# Altium PCB US_shield.pcbdoc
Units mil, origin at the board's own origin, x right, y up, seen from the top; angles counter-clockwise.
Board outline 4000 x 2100 mil, 2 copper layers (Top Layer, Bottom Layer); 18 components, 75 nets, 124 pads, 8 vias.
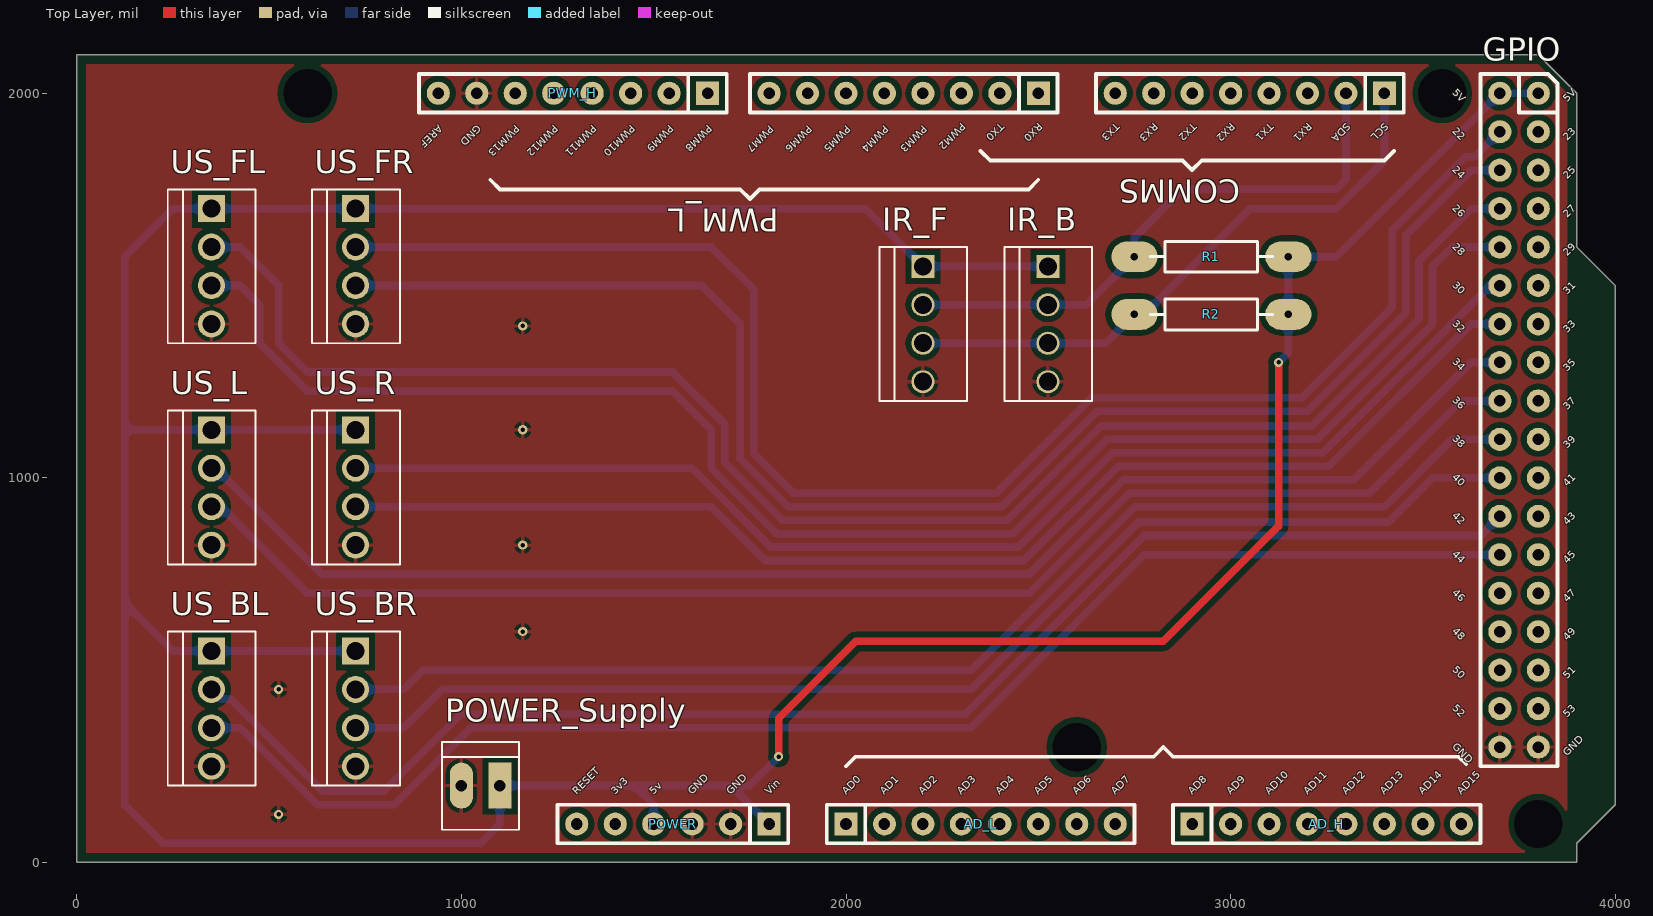
[diagram p0: Top Layer view]
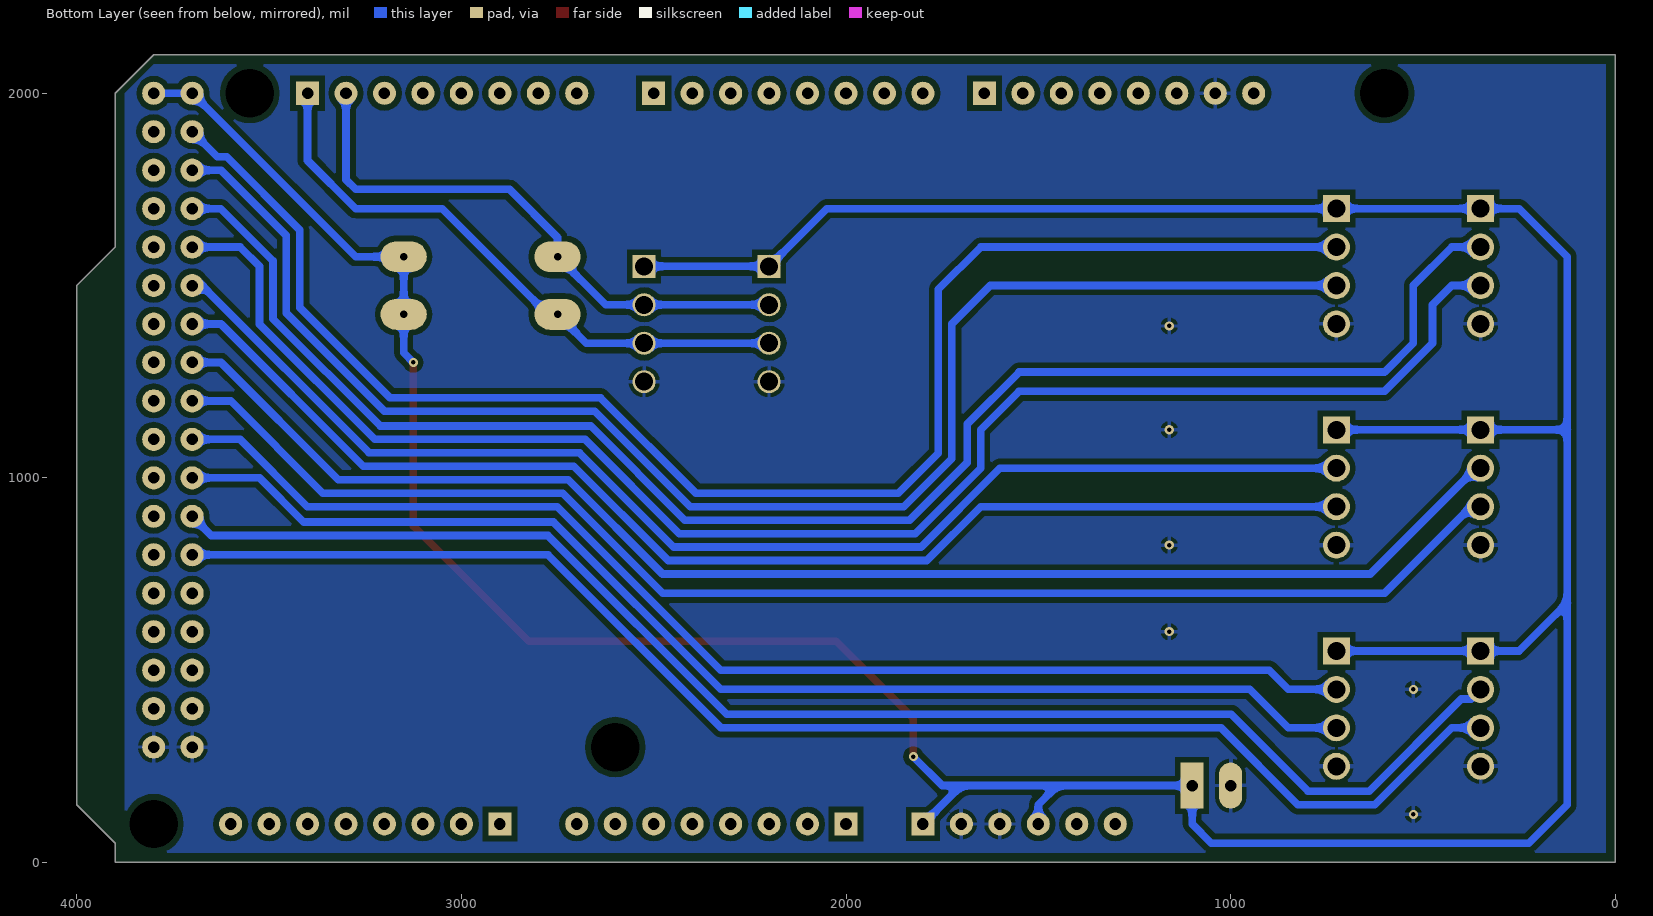
[diagram p1: Bottom Layer view, seen from below]

## Layer stack, top to bottom
Top Solder: solder mask 0.4, Solder Resist, Dk 3.5
Top Layer: signal copper 1.4
Dielectric1: dielectric 12.6, FR-4, Dk 4.8
Bottom Layer: signal copper 1.4
Bottom Solder: solder mask 0.4, Solder Resist, Dk 3.5

## Board outline
0,0 0,2100 3800,2100 3900,2000 3900,1600 4000,1500 4000,150 3900,50 3900,0

## Design rules (kind name [scope] priority, off if disabled: settings)
Clearance [All] p1: gap=15 ignorepadtopadclearanceinfootprint=FALSE
PolygonConnect [All] p1: connectstyle=Relief reliefconductorwidth=10 reliefentries=4 polygonreliefangle="90 Angle" airgapwidth=10
RoutingVias [All] p1: holewidth=28 width=50 viastyle="Through Hole" minholewidth=28 minwidth=50 maxholewidth=28 maxwidth=50
SilkToSolderMaskClearance SilkscreenOverComponentPads [IsPad] p1: minsilkscreentomaskgap=10 clearancetoexposedcopper=TRUE
SolderMaskExpansion [All] p1: expansion=4
Width [All] p1: maxlimit=40 minlimit=10 preferedwidth=20
29 further rules are at their usual default settings.

## Components (designator, comment, footprint, x,y, rotation, side; value= is the part's Value field where it differs from the comment)
AD_H "AD_H" "Header 8x1 8.5mm" 2900,100 r0 top locked
AD_L "AD_L" "Header 8x1 8.5mm" 2000,100 r0 top locked
COMMS "Communication" "Header 8x1 8.5mm" 3400,2000 r180 top
GPIO "IO_36" "HEADER 36X 8MM" 3800,2000 r270 top locked
IR_B "Molex_4" Header4_ecam#1 2525.79,1200 r90 top
IR_F "Molex_4" Header4_ecam#1 2200.79,1200 r90 top
POWER "POWER" "Header 6x1 8.5mm" 1800,100 r180 top locked
POWER_Supply "Molex_2" Header_2Ecam 950,199.21 r0 top
PWM_H "PWM_H" "Header 8x1 8.5mm" 1640,2000 r180 top locked
PWM_L "PWM_L" "Header 8x1 8.5mm" 2500,2000 r180 top locked
R1 "Résistance" AXIAL-0.4 2750,1575 r0 top
R2 "Résistance" AXIAL-0.4 2750,1425 r0 top
US_BL "Molex_4" Header4_ecam#2 350.79,200 r90 top
US_BR "Molex_4" Header4_ecam#2 725.79,200 r90 top
US_FL "Molex_4" Header4_ecam#2 350.79,1350 r90 top
US_FR "Molex_4" Header4_ecam#2 725.79,1350 r90 top
US_L "Molex_4" Header4_ecam#2 350.79,775 r90 top
US_R "Molex_4" Header4_ecam#2 725.79,775 r90 top

## Footprints (in the part's own frame and the unit in brackets; to place one, negate y for a bottom-side part, rotate by r counter-clockwise, add the part's x,y. Pads: shape width x height; smd on the part's side, far side on the other; paste and mask are expansions set on the pad)
AXIAL-0.4 [mil] "Resistor; 2 Leads"
  oval 120x80 hole 19.68: 1(0,0) 2(400,0)
  silkscreen extent 40,-40 360,40
Header4_ecam#1 [mil]
  rect 60x60 hole 46.85: 1(350,0.79)
  round 60 hole 46.85: 2(250,0.79) 3(150,0.79) 4(50,0.79)
  silkscreen extent 0,-114 400,114
Header4_ecam#2 [mil]
  rect 70.28x70.28 hole 46.85: 1(350,0.79)
  round 70.28 hole 46.85: 2(250,0.79) 3(150,0.79) 4(50,0.79)
  silkscreen extent 0,-114 400,114
"Header 6x1 8.5mm" [mil] "Stackable 6 pin header"
  rect 60x60 hole 30: 1(0,0)
  round 60 hole 30: 2(100,0) 3(200,0) 4(300,0) 5(400,0) 6(500,0)
  silkscreen extent -50,-50 550,50, body extent -50,-50 550,50, height 335
"Header 8x1 8.5mm" [mil] "Stackable 8 pin header"
  rect 60x60 hole 30: 1(0,0)
  round 60 hole 30: 2(100,0) 3(200,0) 4(300,0) 5(400,0) 6(500,0) 7(600,0) 8(700,0)
  silkscreen extent -50,-50 750,50, body extent -50,-50 750,50, height 335
"HEADER 36X 8MM" [mil] "Stackable 10 pin header"
  round 60 hole 30: 1(0,0) 2(0,-100) 3(100,0) 4(100,-100) 5(200,0) 6(200,-100) 7(300,0) 8(300,-100) 9(400,0) 10(400,-100) 11(500,0) 12(500,-100) 13(600,0) 14(600,-100) 15(700,0) 16(700,-100) 17(800,0) 18(800,-100) 19(900,0) 20(900,-100) 21(1000,0) 22(1000,-100) 23(1100,0) 24(1100,-100) 25(1200,0) 26(1200,-100) 27(1300,0) 28(1300,-100) 29(1400,0) 30(1400,-100) 31(1500,0) 32(1500,-100) 33(1600,0) 34(1600,-100) 35(1700,0) 36(1700,-100)
  silkscreen extent -50,-150 1750,50, body extent -50,-150 1750,50, height 335
Header_2Ecam [mil]
  rect 60x120 hole 30: 1(150,0.79)
  oval 60x120 hole 30: 2(50,0.79)
  silkscreen extent 0,-114 200,114

## Part data
AD_H PWM_L: Supplier Part Number 1=2698940, Supplier 1=Arrow, Supplier 2=Arrow, Supplier 3=Digi-Key, Supplier 4=Arrow, Supplier Part Number 2=2698939, Supplier Part Number 3=SAM1198-08-ND, Supplier Part Number 4=2698925
AD_L COMMS PWM_H: Supplier Part Number 1=SAM1198-08-ND, Supplier 1=Digi-Key, Supplier 2=Arrow, Supplier 3=Arrow, Supplier 4=Arrow
  AD_L: Supplier 5=Arrow, Supplier Part Number 2=2698939, Supplier Part Number 3=2698940, Supplier Part Number 4=43085273, Supplier Part Number 5=2698925
  COMMS PWM_H: Supplier Part Number 2=2698940, Supplier Part Number 3=2698939, Supplier Part Number 4=2698925
GPIO: "Header, 36-Pin", Supplier="RS 180-0956"
IR_B IR_F US_BL US_BR US_FL US_FR US_L US_R: "Header, 4-Pin", LatestRevisionDate=17-Jul-2002, LatestRevisionNote="Re-released for DXP Platform.", Publisher="Altium Limited", Supplier="Farnell 9731164"
POWER: Supplier Part Number 1=52553843, Supplier 1=Arrow, Supplier 2=Arrow, Supplier 3=Digi-Key, Supplier 4=Arrow, Supplier 5=Arrow, Supplier Part Number 2=2699075, Supplier Part Number 3=SAM1198-06-ND, Supplier Part Number 4=2699089, Supplier Part Number 5=2699088
POWER_Supply: "Header, 2-pin", Designer="ECAM 2005", Supplier=ECAM, Type="Connecteur à vis"
R1 R2: "Résistance standard", Designer="ECAM 2005", Type="Résistance standard"

## Free pads (board coordinates)
  round 62.99 hole 125.98: 0(600,2000) 0(2600,300) 0(3550,2000) 0(3800,100)

## Via types
v1: diameter 23.62, hole 11.81, Top Layer to Bottom Layer, 8 vias

## Nets (pads, with @x,y where several pads share a name; then routed paths per layer and width w, separated by ;. In a path a pad name is that pad's centre, name@x,y a point inside that pad or via, vN(x,y) a via of type N, cw(c..) or ccw(c..) an arc to the next point about the centre after c; other vN are vias at no path point)
3V3: POWER.5
5V: GPIO.1 GPIO.2 IR_B.1 IR_F.1 POWER.1 POWER.4 POWER_Supply.1 R1.2 R2.2 US_BL.1 US_BR.1 US_FL.1 US_FR.1 US_L.1 US_R.1 | length 10489.5
  Top Layer w20: v1(1825,275) 1825,375 2025,575 2825,575 3125,875 v1(3125,1300)
  Bottom Layer w20: US_BR.1 US_BL.1 250,550 125,675 ; US_R.1 US_L.1 125,1125 ; POWER.4 1500,150 1450,200 ; POWER.1 1700,200 ; v1(1825,275) 1750,200 1700,200 ; IR_B.1 IR_F.1 2050,1700 US_FR.1 US_FL.1 250,1700 125,1575 125,1125 ; v1(3125,1300) 3150,1325 R2.2 R1.2 3275,1575 GPIO.2 GPIO.1 ; 125,675 125,150 225,50 1050,50 1100,100 POWER_Supply.1 1450,200 ; 125,675 125,1125 ; 1450,200 1700,200
AD0: AD_L.1
AD1: AD_L.2
AD2: AD_L.3
AD3: AD_L.4
AD4: AD_L.5
AD5: AD_L.6
AD6: AD_L.7
AD7: AD_L.8
AD8: AD_H.1
AD9: AD_H.2
AD10: AD_H.3
AD11: AD_H.4
AD12: AD_H.5
AD13: AD_H.6
AD14: AD_H.7
AD15: AD_H.8
AREF: PWM_H.8
GND: GPIO.35 GPIO.36 IR_B.4 IR_F.4 POWER.2 POWER.3 POWER_Supply.2 PWM_H.7 US_BL.4 US_BR.4 US_FL.4 US_FR.4 US_L.4 US_R.4
  other v1: 525,125 525,450 1159.64,600 1159.64,825 1159.64,1125 1159.64,1395
IO23: GPIO.3
IO25: GPIO.5
IO27: GPIO.7
IO29: GPIO.9
IO31: GPIO.11
IO33: GPIO.13
IO35: GPIO.15
IO37: GPIO.17
IO39: GPIO.19
IO41: GPIO.21
IO43: GPIO.23
IO45: GPIO.25
IO46: GPIO.28
IO47: GPIO.27
IO48: GPIO.30
IO49: GPIO.29
IO50: GPIO.32
IO51: GPIO.31
IO52: GPIO.34
IO53: GPIO.33
PWM2: PWM_L.3
PWM3: PWM_L.4
PWM4: PWM_L.5
PWM5: PWM_L.6
PWM6: PWM_L.7
PWM7: PWM_L.8
PWM8: PWM_H.1
PWM9: PWM_H.2
PWM10: PWM_H.3
PWM11: PWM_H.4
PWM12: PWM_H.5
PWM13: PWM_H.6
RESET: POWER.6
RX0: PWM_L.1
RX1: COMMS.3
RX2: COMMS.5
RX3: COMMS.7
SCL: COMMS.1 IR_B.3 IR_F.3 R2.1 | length 1571.8
  Bottom Layer w20: IR_F.3 IR_B.3 2675,1350 R2.1 2775,1425 3050,1700 3275,1700 3400,1825 COMMS.1
SDA: COMMS.2 IR_B.2 IR_F.2 R1.1 | length 1488.9
  Bottom Layer w20: IR_F.2 IR_B.2 2625,1450 R1.1 2750,1625 2875,1750 3275,1750 3300,1775 COMMS.2
TX0: PWM_L.2
TX1: COMMS.4
TX2: COMMS.6
TX3: COMMS.8
US_BL_echo: GPIO.26 US_BL.3 | length 3702.1
  Bottom Layer w20: US_BL.3 425,350 625,150 825,150 1025,350 2325,350 2775,800 GPIO.26
US_BL_Trig: GPIO.24 US_BL.2 | length 3755.9
  Bottom Layer w20: US_BL.2 375,425 400,425 640,185 798.58,185 998.58,385 2310,385 2775,850 3650,850 GPIO.24
US_BR_echo: GPIO.22 US_BR.3 | length 3244.2
  Bottom Layer w20: US_BR.3 850,350 950,450 2325.5,450 2760.5,885 3410,885 3525,1000 GPIO.22
US_BR_Trig: GPIO.20 US_BR.2 | length 3244.2
  Bottom Layer w20: US_BR.2 850,450 900,500 2326.01,500 2751.01,925 3400.5,925 3575.5,1100 GPIO.20
US_FL_echo: GPIO.10 US_FL.3 | length 4131.1
  Bottom Layer w20: US_FL.3 425,1500 475,1450 475,1350 600,1225 1550,1225 1650,1125 1650,1025 1820,855 2433.52,855 2678.52,1100 3225.5,1100 3525,1399.5 3525,1550 3575,1600 GPIO.10
US_FL_Trig: GPIO.8 US_FL.2 | length 4214.2
  Bottom Layer w20: US_FL.2 425,1600 525,1500 525,1350 600,1275 1550,1275 1685,1140 1685,1040 1835,890 2419.02,890 2664.02,1135 3211.01,1135 3490,1413.99 3490,1564.5 3625.5,1700 GPIO.8
US_FR_echo: GPIO.6 US_FR.3 | length 3899
  Bottom Layer w20: US_FR.3 1625,1500 1725,1400 1725,1049.5 1849.5,925 2404.52,925 2653.02,1173.49 3200,1173.49 3455,1428.49 3455,1630 3625,1800 GPIO.6
US_FR_Trig: GPIO.4 US_FR.2 | length 3997
  Bottom Layer w20: US_FR.2 1650,1600 1760,1490 1760,1063.99 1863.99,960 2390.03,960 2638.52,1208.49 3185.5,1208.49 3420,1442.99 3420,1644.5 3610.5,1835 3635,1835 GPIO.4
US_L_echo: GPIO.18 US_L.3 | length 3650.3
  Bottom Layer w20: US_L.3 375,925 600,700 2476.51,700 2736.51,960 3360,960 3600,1200 GPIO.18
US_L_Trig: GPIO.16 US_L.2 | length 3691.7
  Bottom Layer w20: US_L.2 361.92,1025 636.92,750 2477.01,750 2722.01,995 3320,995 3625,1300 GPIO.16
US_R_echo: GPIO.14 US_R.3 | length 3287.7
  Bottom Layer w20: US_R.3 1650,925 1790,785 2462.51,785 2707.51,1030 3255,1030 3625,1400 GPIO.14
US_R_Trig: GPIO.12 US_R.2 | length 3341.6
  Bottom Layer w20: US_R.2 1600,1025 1805,820 2448.02,820 2693.02,1065 3240,1065 3675,1500 GPIO.12

## Polygon pours and split planes (outlines as drawn)
GND on Bottom Layer "Bottom Layer-GND" (solid, remove dead copper, pour order 0): 25,25 25,2075 3800,2075 3875,2000 3875,25
GND on Top Layer "Top Layer-GND" (solid, remove dead copper, pour order 2): 25,25 25,2075 3800,2075 3875,2000 3875,25

## Silkscreen, mask and mechanical layers (free items; w line width, h text height)
Top Overlay:
  lines w10: 1075,1775 1100,1750 1725,1750 1750,1725 1775,1750 2475,1750 2500,1775 ; 2000,250 2025,275 2800,275 2825,300 2850,275 3592.93,275 3612.7,255.23 ; 2350,1850 2375,1825 2875,1825 2900,1800 2925,1825 3400,1825 3425,1850
  text "5V" at 3575,2000 h20 r315
  text "5V" at 3875,1975 h20 r45
  text "PWM2" at 2300,1925 h20 r225
  text "TX0" at 2400,1925 h20 r225
  text "RX0" at 2500,1925 h20 r225
  text "TX3" at 2700,1925 h20 r225
  text "RX3" at 2800,1925 h20 r225
  text "TX2" at 2900,1925 h20 r225
  text "RX2" at 3000,1925 h20 r225
  text "TX1" at 3100,1925 h20 r225
  text "RX1" at 3200,1925 h20 r225
  text "SDA" at 3300,1925 h20 r225
  text "SCL" at 3400,1925 h20 r225
  text "AREF" at 940,1920 h20 r225
  text "GND" at 1040,1920 h20 r225
  text "PWM13" at 1140,1920 h20 r225
  text "PWM12" at 1240,1920 h20 r225
  text "PWM11" at 1340,1920 h20 r225
  text "PWM10" at 1440,1920 h20 r225
  text "PWM9" at 1540,1920 h20 r225
  text "PWM8" at 1640,1920 h20 r225
  text "PWM7" at 1800,1917.93 h20 r225
  text "PWM6" at 1900,1917.93 h20 r225
  text "PWM5" at 2000,1917.93 h20 r225
  text "PWM4" at 2100,1917.93 h20 r225
  text "PWM3" at 2200,1917.93 h20 r225
  text "22" at 3575,1900 h20 r315
  text "23" at 3875,1875 h20 r45
  text "24" at 3575,1800 h20 r315
  text "25" at 3875,1775 h20 r45
  text "26" at 3575,1700 h20 r315
  text "27" at 3875,1675 h20 r45
  text "28" at 3575,1600 h20 r315
  text "29" at 3875,1575 h20 r45
  text "30" at 3575,1500 h20 r315
  text "31" at 3875,1475 h20 r45
  text "32" at 3575,1400 h20 r315
  text "33" at 3875,1375 h20 r45
  text "34" at 3575,1300 h20 r315
  text "35" at 3875,1275 h20 r45
  text "36" at 3575,1200 h20 r315
  text "37" at 3875,1175 h20 r45
  text "38" at 3575,1100 h20 r315
  text "39" at 3875,1075 h20 r45
  text "40" at 3575,1000 h20 r315
  text "41" at 3875,975 h20 r45
  text "42" at 3575,900 h20 r315
  text "43" at 3875,875 h20 r45
  text "44" at 3575,800 h20 r315
  text "45" at 3875,775 h20 r45
  text "46" at 3575,700 h20 r315
  text "47" at 3875,675 h20 r45
  text "48" at 3575,600 h20 r315
  text "49" at 3875,575 h20 r45
  text "50" at 3575,500 h20 r315
  text "51" at 3875,475 h20 r45
  text "52" at 3575,400 h20 r315
  text "53" at 3875,375 h20 r45
  text "GND" at 3575,300 h20 r315
  text "GND" at 3875,275 h20 r45
  text "RESET" at 1300,175 h20 r45
  text "3v3" at 1400,175 h20 r45
  text "5v" at 1500,175 h20 r45
  text "GND" at 1600,175 h20 r45
  text "GND" at 1700,175 h20 r45
  text "Vin" at 1800,175 h20 r45
  text "AD0" at 2000,175 h20 r45
  text "AD1" at 2100,175 h20 r45
  text "AD2" at 2200,175 h20 r45
  text "AD3" at 2300,175 h20 r45
  text "AD4" at 2400,175 h20 r45
  text "AD5" at 2500,175 h20 r45
  text "AD6" at 2600,175 h20 r45
  text "AD7" at 2700,175 h20 r45
  text "AD8" at 2900,175 h20 r45
  text "AD9" at 3000,175 h20 r45
  text "AD10" at 3100,175 h20 r45
  text "AD11" at 3200,175 h20 r45
  text "AD12" at 3300,175 h20 r45
  text "AD13" at 3400,175 h20 r45
  text "AD14" at 3500,175 h20 r45
  text "AD15" at 3600,175 h20 r45
Mechanical 1:
  circle w5: c3800,100 r62.99
  circle w5: c3550,2000 r62.99
  circle w5: c2600,300 r62.99
  circle w5: c600,2000 r62.99
  lines w5: 0,0 0,2100 3800,2100 3900,2000 3900,1600 4000,1500 4000,150 3900,50 3900,0 0,0